# EAGLE board sirin-clone-schematic (EAGLE 9.3.1)
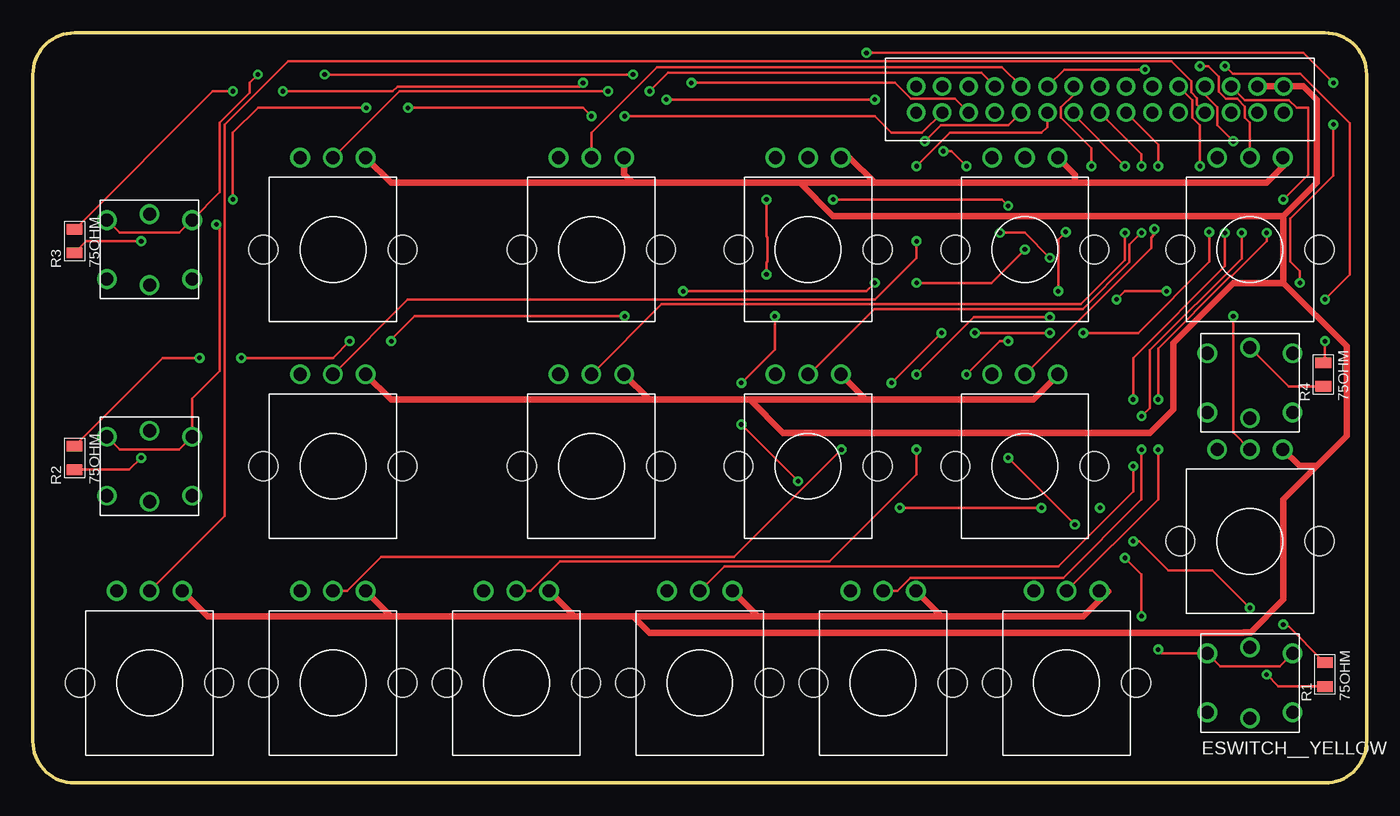
[diagram p0: board, top side]
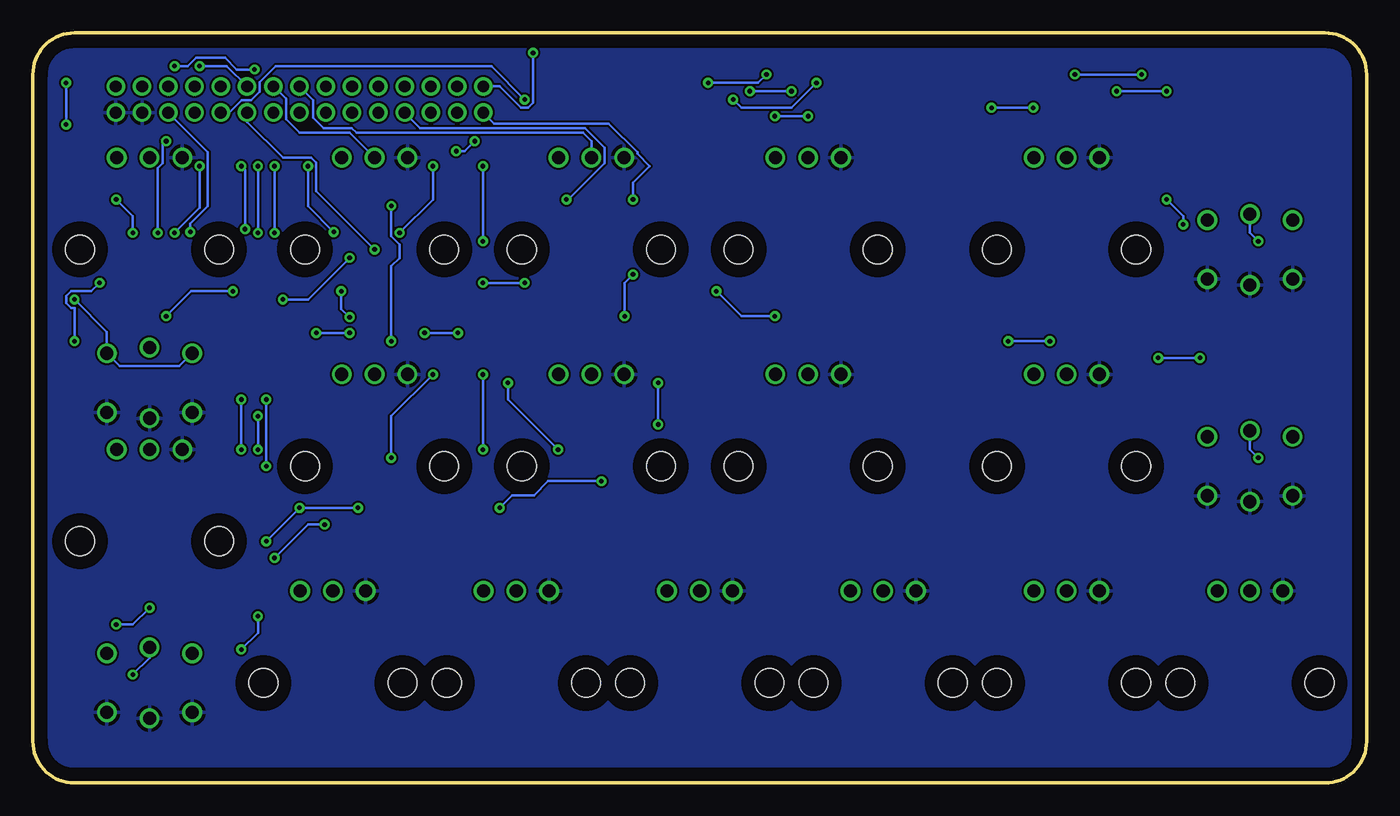
[diagram p1: board, bottom side, seen from below]

Size 101.6 x 57.15 mm. Coordinates in mm from the lower left corner, seen from the top.
Outline: 0,3.17 arc90 3.17,0 98.42,0 arc90 101.6,3.17 101.6,53.98 arc90 98.42,57.15 3.17,57.15 arc90 0,53.98 0,3.17
Copper layers (1*16): Top 0.035mm / dielectric 1.5mm / Bottom 0.035mm
Design rules "default": minimum track width 6mil, minimum drill 0.35mm, track to track 6mil, track to pad 6mil, pad to pad 6mil, via to via 6mil, smd to smd 6mil, copper to edge 40mil, drill to drill 6mil, minimum pad ring 10mil, minimum via ring 8mil, stop-mask expansion 4mil, vias tented up to drill 0mil, thermal gap 10mil

## Footprints (pad centres in the part's own frame; a part is rotated, then mirrored left to right if it is on the bottom)
MOLEX_30PINCONNECTOR_2MM = drill 0.9: P$1 -14,1; P$2 -12,1; P$3 -10,1; P$4 -8,1; P$5 -6,1; P$6 -4,1; P$7 -2,1; P$8 0,1; P$9 2,1; P$10 4,1; P$11 6,1; P$12 8,1; P$13 10,1; P$14 12,1; P$15 14,1; P$16 -14,-1; P$17 -12,-1; P$18 -10,-1; P$19 -8,-1; P$20 -6,-1; P$21 -4,-1; P$22 -2,-1; P$23 0,-1; P$24 2,-1; P$25 4,-1; P$26 6,-1; P$27 8,-1; P$28 10,-1; P$29 12,-1; P$30 14,-1
0805 = smd 0.8 x 1.2: 1 -0.9,0; 2 0.9,0
BOURNS_PTV09 = drill 1 pad 1.5: 1 -2.5,-7; 2 0,-7; 3 2.5,-7 | hole 2.2: -5.3,0; 5.3,0
ESWITCH_TL1240YQ1JCLR = drill 1: 1 -3.25,-2.25; 2 3.25,-2.25; 3 -3.25,2.25; 4 3.25,2.25; + 0,2.7; - 0,-2.7

## Placement (x,y rotation side)
J1  30_PIN_CONNECTOR_MALE  [MOLEX_30PINCONNECTOR_2MM]  81.28,52.07 0 top
R1  75OHM  [0805]  98.42,8.26 90 top
R2  75OHM  [0805]  3.17,24.77 90 top
R3  75OHM  [0805]  3.17,41.27 90 top
R4  75OHM  [0805]  98.3,31.11 90 top
U$1  BOURNS_20K_POTENTIOMETER  [BOURNS_PTV09]  59.05,40.64 180 top
U$2  BOURNS_20K_POTENTIOMETER  [BOURNS_PTV09]  50.8,7.62 180 top
U$3  BOURNS_20K_POTENTIOMETER  [BOURNS_PTV09]  92.71,40.64 180 top
U$4  BOURNS_20K_POTENTIOMETER  [BOURNS_PTV09]  64.77,7.62 180 top
U$5  BOURNS_20K_POTENTIOMETER  [BOURNS_PTV09]  78.74,7.62 180 top
U$6  BOURNS_20K_POTENTIOMETER  [BOURNS_PTV09]  22.86,7.62 180 top
U$7  BOURNS_20K_POTENTIOMETER  [BOURNS_PTV09]  8.89,7.62 180 top
U$8  BOURNS_20K_POTENTIOMETER  [BOURNS_PTV09]  22.86,40.64 180 top
U$9  BOURNS_20K_POTENTIOMETER  [BOURNS_PTV09]  42.55,40.64 180 top
U$10  BOURNS_20K_POTENTIOMETER  [BOURNS_PTV09]  75.56,40.64 180 top
U$12  BOURNS_20K_POTENTIOMETER  [BOURNS_PTV09]  59.05,24.13 180 top
U$13  BOURNS_20K_POTENTIOMETER  [BOURNS_PTV09]  75.56,24.13 180 top
U$14  BOURNS_20K_POTENTIOMETER  [BOURNS_PTV09]  22.86,24.13 180 top
U$15  BOURNS_20K_POTENTIOMETER  [BOURNS_PTV09]  92.71,18.41 180 top
U$16  BOURNS_20K_POTENTIOMETER  [BOURNS_PTV09]  36.83,7.62 180 top
U$17  BOURNS_20K_POTENTIOMETER  [BOURNS_PTV09]  42.55,24.13 180 top
U$18  ESWITCH__YELLOW  [ESWITCH_TL1240YQ1JCLR]  92.71,7.62 0 top
U$19  ESWITCH__YELLOW  [ESWITCH_TL1240YQ1JCLR]  8.89,24.13 0 top
U$20  ESWITCH__YELLOW  [ESWITCH_TL1240YQ1JCLR]  8.89,40.64 0 top
U$21  ESWITCH__YELLOW  [ESWITCH_TL1240YQ1JCLR]  92.71,30.48 0 top

## Library data of the parts
J1 = sirin-clone-library; SPICEPREFIX: X
R1-R4 U$1-U$10 U$12-U$21 = sirin-clone-library

## Nets
3.3V: J1.P$14 J1.P$15 U$1.1 U$2.1 U$3.1 U$4.1 U$5.1 U$6.1 U$7.1 U$8.1 U$9.1 U$10.1 U$12.1 U$13.1 U$14.1 U$15.1 U$16.1 U$17.1
GND: J1.P$29 J1.P$30 U$1.3 U$2.3 U$3.3 U$4.3 U$5.3 U$6.3 U$7.3 U$8.3 U$9.3 U$10.3 U$12.3 U$13.3 U$14.3 U$15.3 U$16.3 U$17.3 U$18.1 U$18.2 U$18.- U$19.1 U$19.2 U$19.- U$20.1 U$20.2 U$20.- U$21.1 U$21.2 U$21.-
N$1: R1.1 U$18.+
N$2: R2.1 U$19.+
N$3: R3.1 U$20.+
N$4: R4.1 U$21.+
PIN2/SW1: J1.P$19 U$18.3 U$18.4
PIN3/SW2: J1.P$17 U$19.3 U$19.4
PIN4/SW3: J1.P$18 U$20.3 U$20.4
PIN5/SW4: J1.P$6 U$21.3 U$21.4
PIN8/MIDILED: J1.P$3
PIN15/KNOB1(VOL): J1.P$24 U$13.2
PIN16/KNOB2: J1.P$28 U$6.2
PIN17/KNOB3: J1.P$27 U$7.2
PIN20/KNOB4: J1.P$4 U$8.2
PIN21/KNOB5: J1.P$5 U$9.2
PIN24/LED1: J1.P$16 R1.2
PIN25/LED2: J1.P$25 R2.2
PIN26/KNOB6: J1.P$9 U$10.2
PIN27/KNOB7: J1.P$22 U$17.2
PIN28/KNOB8: J1.P$23 U$12.2
PIN29/KNOB9: J1.P$21 U$14.2
PIN30/KNOB10: J1.P$20 U$15.2
PIN31/KNOB11: J1.P$8 U$1.2
PIN32/LED3: J1.P$26 R3.2
PIN33/LED4: J1.P$1 R4.2
PINA10/KNOB12: J1.P$11 U$2.2
PINA11/KNOB13: J1.P$10 U$3.2
PINA12/KNOB14: J1.P$12 U$4.2
PINA13/KNOB15: J1.P$13 U$5.2
PINA14/KNOB16: J1.P$7 U$16.2

## Tracks (layer width: path | path; a pad name or v marks a point on that pad's centre or on a via)
3.3V
  Top 0.508: J1.P$14 J1.P$15 96.79,53.07 97.79,52.07 97.79,45.72 95.25,43.18 | 95.25,38.1 100.08,33.27 100.08,26.42 97.79,24.13 | 97.79,24.13 95.25,21.59 95.25,13.97 92.76,11.48 92.23,11.48 92.18,11.43 46.99,11.43 45.72,12.7 | 95.25,43.18 95.25,38.1 | 45.72,45.72 27.28,45.72 U$8.1 | 45.72,45.72 58.42,45.72 | 58.42,45.72 64.14,45.72 | 64.14,45.72 79.38,45.72 | 79.38,45.72 93.98,45.72 95.21,46.95 U$3.1 | 45.72,45.72 45.05,46.4 U$9.1 | 58.42,45.72 60.96,43.18 95.25,43.18 | 46.97,29.21 27.28,29.21 U$14.1 | 46.97,29.21 54.61,29.21 | 54.61,29.21 63.48,29.21 | 63.48,29.21 76.2,29.21 78.06,31.07 U$13.1 | 95.25,38.1 91.44,38.1 86.87,33.53 86.87,28.45 85.09,26.67 57.15,26.67 54.61,29.21 | 27.28,12.7 13.31,12.7 U$7.1 | 27.28,12.7 41.25,12.7 | 41.25,12.7 45.72,12.7 | 45.72,12.7 55.22,12.7 | 55.22,12.7 69.19,12.7 | 69.19,12.7 80.01,12.7 81.92,14.61 81.9,14.62 U$5.1 | U$1.1 62.22,47.64 64.14,45.72 | U$10.1 79.38,46.33 79.38,45.72 | U$12.1 63.48,29.21 | U$17.1 46.97,29.21 | U$6.1 27.28,12.7 | U$16.1 41.25,12.7 | U$2.1 55.22,12.7 | U$4.1 69.19,12.7 | U$15.1 96.5,24.13 97.79,24.13
GND
  pour Bottom: -2.54,57.15 -2.54,-2.54 102.87,-2.54 104.14,-1.27 104.14,58.42 102.87,59.69 -2.54,59.69
N$1  (via drill 0.35)
  Top 0.203: R1.1 94.88,7.36 v93.98,8.26
  Bottom 0.203: v93.98,8.26 92.71,9.53 U$18.+
N$2  (via drill 0.35)
  Top 0.203: R2.1 7.36,23.86 v8.26,24.77
  Bottom 0.203: v8.26,24.77 8.89,25.4 U$19.+
N$3  (via drill 0.35)
  Top 0.203: R3.1 4.08,41.27 v8.26,41.27
  Bottom 0.203: v8.26,41.27 8.89,41.91 U$20.+
N$4
  Top 0.203: R4.1 95.67,30.21 U$21.+
PIN2/SW1  (via drill 0.35)
  Top 0.203: U$18.4 94.98,8.89 90.44,8.89 U$18.3 86.02,9.87 v85.72,10.16 | v84.45,12.7 84.45,15.88 v83.19,17.14 | v79.38,19.68 v74.3,24.77 | v71.12,31.11 73.66,33.66 v74.3,33.66 | v60.96,44.45 73.81,44.45 v74.29,43.97
  Bottom 0.203: v85.72,10.16 84.45,11.43 v84.45,12.7 | v83.19,17.14 80.64,19.68 v79.38,19.68 | v74.3,24.77 74.3,27.94 v71.12,31.11 | v74.3,33.66 74.3,39.37 73.66,40.01 73.66,41.02 74.29,41.65 v74.29,43.97 | J1.P$19 72.1,49.89 59.54,49.89 58.05,48.39 58.05,47.22 60.82,44.45 v60.96,44.45
PIN3/SW2  (via drill 0.35)
  Top 0.203: U$19.3 6.62,25.4 11.16,25.4 U$19.4 12.14,29.29 14.25,31.39 14.25,42.27 v13.97,42.55 | v15.24,44.45 15.24,49.53 17.14,51.44 v25.4,51.44 | v28.57,51.44 41.91,51.44 v42.55,50.8 | v45.09,50.8 64.14,50.8 65.41,49.53 67.74,49.53 J1.P$17
  Bottom 0.203: v13.97,42.55 13.97,43.18 v15.24,44.45 | v25.4,51.44 v28.57,51.44 | v42.55,50.8 v45.09,50.8
PIN4/SW3  (via drill 0.35)
  Top 0.203: U$20.3 6.62,41.91 11.16,41.91 U$20.4 14.25,45 14.25,50.31 16.51,52.57 16.51,53.34 v17.14,53.98 | v22.23,53.98 v45.72,53.98 | v50.16,53.34 65.66,53.34 66.88,52.11 70.24,52.11 J1.P$18
  Bottom 0.203: v17.14,53.98 v22.23,53.98 | v45.72,53.98 46.35,53.34 v50.16,53.34
PIN5/SW4  (via drill 0.35)
  Top 0.203: J1.P$6 78.57,54.36 v84.71,54.36 | v90.81,54.61 91.39,54.03 96.55,54.03 100.33,50.25 100.33,38.73 v98.42,36.83
  Bottom 0.203: U$21.3 90.44,31.75 94.98,31.75 U$21.4 95.96,34.37 v98.42,36.83 | v84.71,54.36 86.06,54.36 86.95,55.24 89.16,55.24 89.79,54.61 v90.81,54.61
PIN15/KNOB1(VOL)  (via drill 0.35)
  Top 0.203: U$13.2 85.19,40.76 85.19,41.56 85.44,41.8 v85.44,42.2 | v85.72,46.99 85.72,48.62 J1.P$24
  Bottom 0.203: v85.44,42.2 85.44,46.7 v85.72,46.99
PIN16/KNOB2  (via drill 0.35)
  Top 0.203: v61.59,25.4 53.42,17.22 26.54,17.22 23.93,14.62 U$6.2 | v65.41,30.48 v69.22,34.29 | v71.75,34.29 v77.47,34.29 | v89.6,41.98 89.6,41.59 89.63,41.56 89.63,39.72 84.2,34.29 v80.01,34.29
  Bottom 0.203: v61.59,25.4 65.41,29.21 v65.41,30.48 | v69.22,34.29 v71.75,34.29 | v77.47,34.29 v80.01,34.29 | v89.6,41.98 89.6,42.61 88.27,43.94 88.27,47.62 88.27,48.05 J1.P$28
PIN17/KNOB3
  Top 0.203: U$7.2 14.61,20.34 14.61,50.16 19.43,54.99 86.71,54.99 88.24,53.47 88.24,52.62 88.68,52.17 88.68,51.67 J1.P$27
PIN20/KNOB4  (via drill 0.35)
  Top 0.203: U$8.2 27.93,52.7 v43.81,52.7 | v46.99,52.7 48.39,54.1 72.25,54.1 J1.P$4
  Bottom 0.203: v43.81,52.7 v46.99,52.7
PIN21/KNOB5
  Top 0.203: J1.P$5 73.81,54.54 47.55,54.54 42.55,49.53 U$9.2
PIN24/LED1  (via drill 0.35)
  Top 0.203: R1.2 95.52,12.06 v95.25,12.06 | v92.71,13.34 89.85,16.2 86.49,16.2 84.27,18.41 v83.82,18.41 | v55.88,44.45 55.88,41.65 55.97,41.56 55.97,39.72 55.88,39.63 v55.88,38.73 | v56.52,35.56 56.52,33.02 v53.98,30.48 | v53.98,27.3 v58.29,22.99 | v66.04,20.95 v76.83,20.95
  Bottom 0.203: v95.25,12.06 93.98,12.06 v92.71,13.34 | v83.82,18.41 v81.28,20.95 v76.83,20.95 | J1.P$16 66.45,50.24 57.73,50.24 55.55,48.06 55.55,47.93 54.61,46.99 55.88,45.72 v55.88,44.45 | v55.88,38.73 56.52,38.1 v56.52,35.56 | v53.98,30.48 v53.98,27.3 | v58.29,22.99 62.36,22.99 63.44,21.91 65.08,21.91 v66.04,20.95
PIN25/LED2  (via drill 0.35)
  Top 0.203: R2.2 9.89,32.38 v12.7,32.38 | v24.13,33.66 22.86,32.38 v15.88,32.38 | v27.3,33.66 27.3,33.78 29.08,35.56 v45.09,35.56 | v49.53,37.47 63.5,37.47 v64.14,38.1 | v67.31,38.1 73.03,38.1 v75.56,40.64
  Bottom 0.203: v12.7,32.38 v15.88,32.38 | v24.13,33.66 v27.3,33.66 | v45.09,35.56 47.62,35.56 v49.53,37.47 | v64.14,38.1 v67.31,38.1 | J1.P$25 85.28,50.35 82.55,47.62 80.38,47.62 80.01,47.25 80.01,45.09 v75.56,40.64
PIN26/KNOB6
  Bottom 0.203: U$10.2 77.45,49.53 81.28,49.53 82.32,50.57 82.32,52.11 J1.P$9
PIN27/KNOB7  (via drill 0.35)
  Top 0.203: U$17.2 47.89,36.47 79.84,36.47 83.19,39.82 v83.19,41.91 | v83.19,46.99 79.28,50.9 J1.P$22
  Bottom 0.203: v83.19,41.91 v83.19,46.99
PIN28/KNOB8  (via drill 0.35)
  Top 0.203: v84.45,41.91 83.54,41 83.54,39.68 79.98,36.12 64.1,36.12 59.11,31.13 U$12.2 | v84.45,46.99 84.45,47.9 J1.P$23
  Bottom 0.203: v84.45,41.91 v84.45,46.99
PIN29/KNOB9  (via drill 0.35)
  Top 0.203: U$14.2 28.56,36.83 64.14,36.83 67.31,40.01 v67.31,41.27 | v67.31,46.99 69.85,49.53 76.83,49.53 77.28,49.98 J1.P$21
  Bottom 0.203: v67.31,41.27 v67.31,46.99
PIN30/KNOB10  (via drill 0.35)
  Top 0.203: U$15.2 91.44,26.68 v91.44,35.56 | v86.36,37.47 83.19,37.47 v82.55,36.83 | v77.47,40.01 75.56,41.91 v73.66,41.91 | v71.12,46.99 69.98,48.13 v69.34,48.13 | v67.94,48.9 69.16,50.11 74.32,50.11 J1.P$20
  Bottom 0.203: v91.44,35.56 89.53,37.47 v86.36,37.47 | v82.55,36.83 80.64,36.83 v77.47,40.01 | v73.66,41.91 71.12,44.45 v71.12,46.99 | v69.34,48.13 68.71,48.13 v67.94,48.9
PIN31/KNOB11
  Bottom 0.203: J1.P$8 80.24,52.03 80.24,50.67 79.45,49.89 77.31,49.89 76.95,49.53 59.69,49.53 59.05,48.9 U$1.2
PIN32/LED3  (via drill 0.35)
  Top 0.203: R3.2 13.71,52.7 v15.24,52.7 | v19.05,52.7 27.42,52.7 27.78,53.06 41.63,53.06 v41.91,53.34 | v48.26,52.07 v64.14,52.07
  Bottom 0.203: v15.24,52.7 v19.05,52.7 | v41.91,53.34 43.81,51.44 47.62,51.44 v48.26,52.07 | v64.14,52.07 66.67,54.61 83.09,54.61 84.32,53.38 84.32,52.67 84.97,52.03 85.68,52.03 86.64,51.07 J1.P$26
PIN33/LED4  (via drill 0.35)
  Top 0.203: R4.2 98.42,32.14 v98.42,33.66 | v96.52,38.1 96.52,38.99 95.79,39.72 95.79,43 99.06,46.27 v99.06,50.16 | v99.06,53.34 96.77,55.63 v63.5,55.63
  Bottom 0.203: v98.42,33.66 98.42,36.2 98.43,36.2 98.69,36.2 99.06,36.57 99.06,37.09 98.69,37.46 97.16,37.46 v96.52,38.1 | v99.06,50.16 v99.06,53.34 | v63.5,55.63 63.5,51.81 63.87,51.44 64.4,51.44 66.03,53.07 J1.P$1
PINA10/KNOB12  (via drill 0.35)
  Top 0.203: U$2.2 52.69,16.51 78.11,16.51 83.82,22.23 v83.82,24.13 | v83.82,29.21 83.82,32.38 90.81,39.37 v90.81,41.91 | v88.9,46.99 88.9,50.09 88.32,50.67 88.32,52.03 J1.P$11
  Bottom 0.203: v83.82,24.13 v83.82,29.21 | v90.81,41.91 88.9,43.81 v88.9,46.99
PINA11/KNOB13  (via drill 0.35)
  Top 0.203: U$3.2 92.71,50.28 92.32,50.67 92.32,51.52 91.73,52.11 90.88,52.11 90.32,52.67 90.32,53.82 89.53,54.61 v88.9,54.61
  Bottom 0.203: v88.9,54.61 86.82,54.61 J1.P$10
PINA12/KNOB14  (via drill 0.35)
  Top 0.203: U$4.2 65.84,14.62 66.85,15.63 78.49,15.63 84.45,21.59 v84.45,25.4 | v84.45,27.94 85.09,28.58 85.09,32.97 92.08,39.96 v92.08,41.91 | v91.44,48.9 90.24,50.1 90.24,51.47 89.28,52.42 J1.P$12
  Bottom 0.203: v84.45,25.4 v84.45,27.94 | v92.08,41.91 92.08,46.85 91.7,47.22 91.7,48.63 v91.44,48.9
PINA13/KNOB15  (via drill 0.35)
  Top 0.203: U$5.2 85.72,21.61 v85.72,25.4 | v85.72,29.21 85.72,33.1 91.23,38.61 91.31,38.61 93.98,41.27 v93.98,41.91 | v95.25,44.45 97.16,46.35 97.16,51.44 96.27,51.44 95.68,52.03 92.32,52.03 J1.P$13
  Bottom 0.203: v85.72,25.4 v85.72,29.21 | v93.98,41.91 93.98,43.18 v95.25,44.45
PINA14/KNOB16  (via drill 0.35)
  Top 0.203: U$16.2 37.9,14.62 40.15,16.87 60.68,16.87 67.31,23.5 v67.31,25.4 | v67.31,31.11 71.68,35.49 v77.47,35.49 | v78.11,37.47 78.11,41.41 v78.67,41.98 | v80.64,46.99 80.64,48.35 78.32,50.67 78.32,51.47 79.28,52.42 J1.P$7
  Bottom 0.203: v67.31,25.4 v67.31,31.11 | v77.47,35.49 78.11,36.12 v78.11,37.47 | v78.67,41.98 80.64,43.95 v80.64,46.99